# Altium PCB 3PDT_FootswitchAdapter.PcbDoc
Units mm, origin at the board's own origin, x right, y up, seen from the top; angles counter-clockwise.
Board outline 21.72 x 22.86 mm, 2 copper layers (Top Layer, Bottom Layer); 3 components, 9 nets, 21 pads, 0 vias.
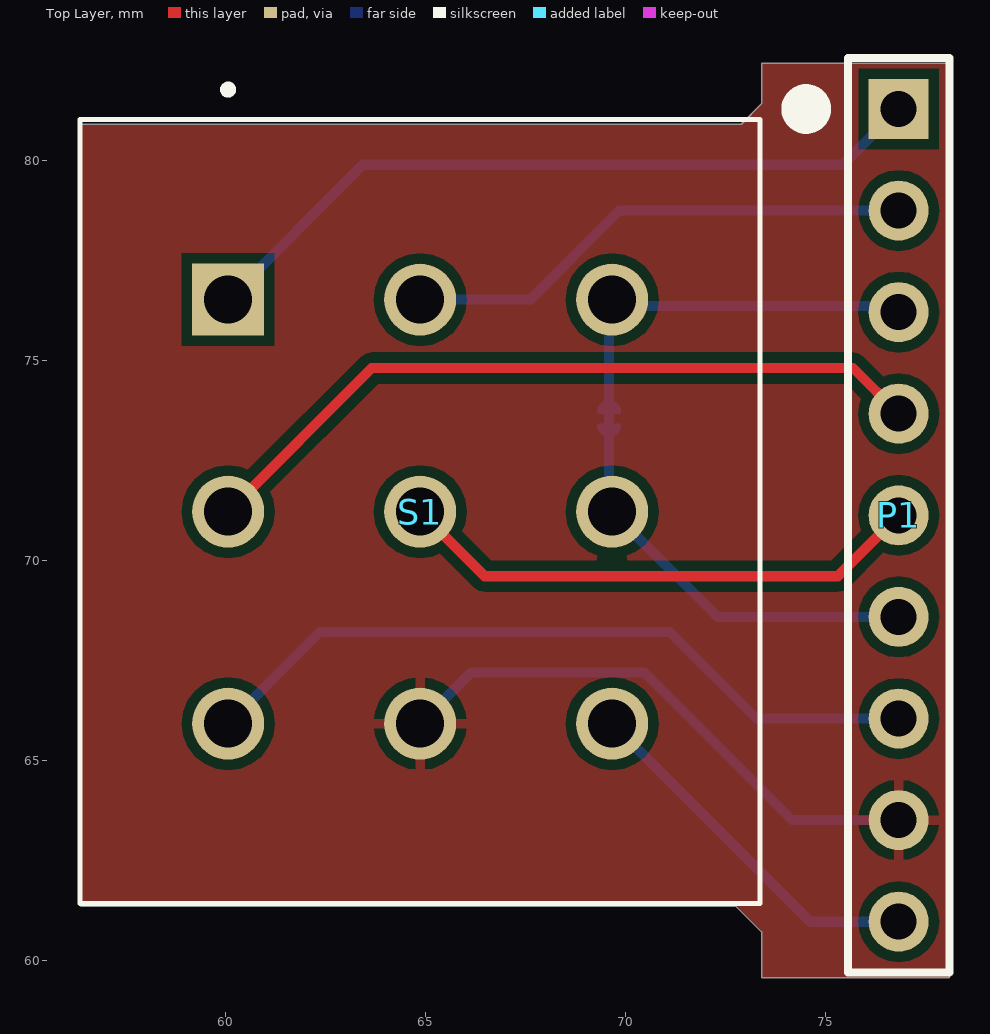
[diagram p0: Top Layer view]
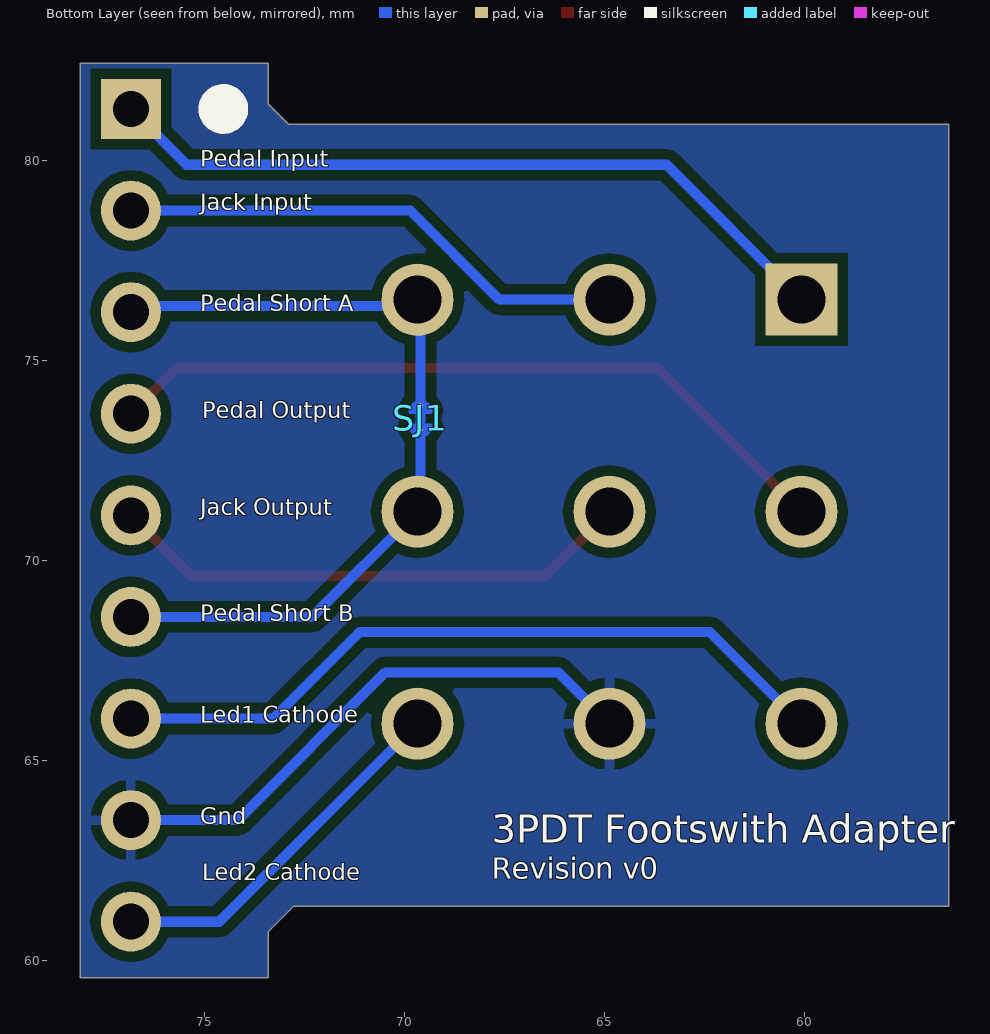
[diagram p1: Bottom Layer view, seen from below]

## Layer stack, top to bottom
Top Solder: solder mask 0.0102, Solder Resist, Dk 3.5
Top Layer: signal copper 0.0356
Dielectric 1: dielectric 0.32, FR-4, Dk 4.8
Bottom Layer: signal copper 0.0356
Bottom Solder: solder mask 0.0102, Solder Resist, Dk 3.5

## Board outline
56.388,61.341 72.771,61.341 73.406,60.706 73.406,59.563 78.105,59.563 78.105,82.423 73.406,82.423 73.406,81.407 72.898,80.899 56.388,80.899
board region "Default Layer Stack Region": 56.388,61.341 72.771,61.341 73.406,60.706 73.406,59.563 78.105,59.563 78.105,82.423 73.406,82.423 73.406,81.407 72.898,80.899 56.388,80.899
board region "Default Layer Stack Region": 56.388,61.341 72.771,61.341 73.406,60.706 73.406,59.563 78.105,59.563 78.105,82.423 73.406,82.423 73.406,81.407 72.898,80.899 56.388,80.899
board region "Layer Stack Region 1": 56.388,61.341 72.771,61.341 73.406,60.706 73.406,59.563 78.105,59.563 78.105,82.423 73.406,82.423 73.406,81.407 72.898,80.899 56.388,80.899

## Design rules (kind name [scope] priority, off if disabled: settings)
Clearance [All] p1: gap=0.254 ignorepadtopadclearanceinfootprint=FALSE except(0: Arc-Hole Track-Hole SMDPad-Hole THPad-Hole Via-Hole Fill-Hole Poly-Hole Region-Hole Text-Hole)
PolygonConnect [All] p1: connectstyle=Relief reliefconductorwidth=0.254 reliefentries=4 polygonreliefangle="90 Angle" airgapwidth=0.254
RoutingVias [All] p1: holewidth=0.711 width=1.27 viastyle="Through Hole" minholewidth=0.711 minwidth=1.27 maxholewidth=0.711 maxwidth=1.27
SolderMaskExpansion [All] p1: expansion=0.102 istentingtop=FALSE
Width [All] p1: maxlimit=0.254 minlimit=0.254 preferedwidth=0.254
30 further rules are at their usual default settings.

## Components (designator, comment, footprint, x,y, rotation, side; value= is the part's Value field where it differs from the comment)
P1 "Header 9" HDR1X9_2.54 76.835,81.28 r270 top
S1 "FS57003PLT2B2M2QE" SW_FS57003PLT2B2M2QE 64.871,71.213 r270 top
SJ1 "Solder Jumper Shorted" SOLDER_JUMPER_SHORTED 69.596,73.533 r90 bottom net-tie

## Footprints (in the part's own frame and the unit in brackets; to place one, negate y for a bottom-side part, rotate by r counter-clockwise, add the part's x,y. Pads: shape width x height; smd on the part's side, far side on the other; paste and mask are expansions set on the pad)
HDR1X9_2.54 [mm] "Connector; Header; 9 Position; 2.54mm"
  rect 1.5x1.5 hole 0.9: 1(0,0)
  round 1.5 hole 0.9: 2(2.54,0) 3(5.08,0) 4(7.62,0) 5(10.16,0) 6(12.7,0) 7(15.24,0) 8(17.78,0) 9(20.32,0)
  silkscreen extent -1.27,-1.27 21.59,1.27, body extent -1.27,-1.27 21.59,1.27, height 9.5
SOLDER_JUMPER_SHORTED [mm]
  round 0.1 smd mask+0: 1(-0.28,0) 1(-0.28,0) 2(0.33,0)
  Top Layer region: -0.19,0.25 -0.19,-0.25 -0.25,-0.25 -0.43,-0.07 -0.43,0.13
  Top Layer region: 0.17,-0.25 0.17,0.25 0.23,0.25 0.41,0.07 0.41,-0.13
  Top Layer lines w0.1: -0.17,-0.25 cw(c-0.17,0) -0.17,0.25 -0.17,-0.25 ; 0.17,-0.25 ccw(c0.17,0) 0.17,0.25 0.17,-0.25
  Top Layer lines w0.254: -0.17,0 0.17,0
SW_FS57003PLT2B2M2QE [mm]
  rect 1.8x1.8 / inner round 1.8 / far side rect 1.8x1.8 hole 1.2: 1(-5.3,-4.8)
  round 1.8 hole 1.2: 2(-5.3,0) 3(-5.3,4.8) 4(0,-4.8) 5(0,0) 6(0,4.8) 7(5.3,-4.8) 8(5.3,0) 9(5.3,4.8)
  silkscreen extent -10.65,-8.5 9.8,8.5, body extent -9.8,-8.5 9.8,8.5, height 2.6

## Part data
P1: "Header, 9-Pin", LatestRevisionDate=17-Jul-2002, LatestRevisionNote="Re-released for DXP Platform.", Publisher="Altium Limited"
S1: "Mechanical 3PDT Footswitch"

## Nets (pads, with @x,y where several pads share a name; then routed paths per layer and width w, separated by ;. In a path a pad name is that pad's centre, name@x,y a point inside that pad or via, vN(x,y) a via of type N, cw(c..) or ccw(c..) an arc to the next point about the centre after c; other vN are vias at no path point)
Gnd: P1.8 S1.8 | length 14
  Bottom Layer w0.254: S1.8 66.152,67.194 70.474,67.194 74.168,63.5 P1.8
JackInput: P1.2 S1.2 | length 12.9
  Bottom Layer w0.254: S1.2 67.623,76.513 69.85,78.74 P1.2
JackOutput: P1.5 S1.5 | length 13.3
  Top Layer w0.254: S1.5 66.488,69.596 75.311,69.596 P1.5
Led1_Cathode: P1.7 S1.7 | length 18.6
  Bottom Layer w0.254: S1.7 62.357,68.199 71.12,68.199 73.279,66.04 P1.7
Led2_Cathode: P1.9 S1.9 | length 9.2
  Bottom Layer w0.254: S1.9 74.624,60.96 P1.9
PedalInput: P1.1 S1.1 | length 18.7
  Bottom Layer w0.254: S1.1 63.441,79.883 75.438,79.883 P1.1
PedalOutput: P1.4 S1.4 | length 18.7
  Top Layer w0.254: S1.4 63.661,74.803 75.692,74.803 P1.4
PedalShort_A: P1.3 S1.3 SJ1.2 | length 10
  Bottom Layer w0.254: SJ1.2 69.596,76.438 S1.3 69.828,76.356 76.679,76.356 P1.3
PedalShort_B: P1.6 S1.6 SJ1.1 | length 10.3
  Bottom Layer w0.254: SJ1.1@69.596,73.253 69.596,71.288 S1.6 72.304,68.58 P1.6

## Polygon pours and split planes (outlines as drawn)
Gnd on Top Layer "GND_TOP" (solid, pour order 0): 56.388,61.341 72.771,61.341 73.406,60.706 73.406,59.563 78.105,59.563 78.105,82.423 73.406,82.423 73.406,81.407 72.898,80.899 56.388,80.899
Gnd on Bottom Layer "GND_BOTTOM" (solid, pour order 1): 56.388,61.341 72.771,61.341 73.406,60.706 73.406,59.563 78.105,59.563 78.105,82.423 73.406,82.423 73.406,81.407 72.898,80.899 56.388,80.899

## Silkscreen, mask and mechanical layers (free items; w line width, h text height)
Top Overlay:
  circle w0.635: c74.524,81.279 r0.305
  text "Super DOD" at 73.28,36.387 h2.5
  text "Revision v0" at 73.28,35.062 h1.5
Bottom Overlay:
  circle w0.635: c74.524,81.28 r0.305
  text "Pedal Input" at 75.104,79.691 h0.7
  text "Jack Input" at 75.105,78.61 h0.7
  text "Pedal Short A" at 75.104,76.08 h0.7
  text "Pedal Output" at 75.057,73.403 h0.7
  text "Jack Output" at 75.105,70.99 h0.7
  text "Pedal Short B" at 75.104,68.333 h0.7
  text "Led1 Cathode" at 75.104,65.793 h0.7
  text "Gnd" at 75.104,63.253 h0.7
  text "3PDT Footswith Adapter" at 67.817,62.698 h1.2
  text "Revision v0" at 67.818,61.855 h0.9
  text "Led2 Cathode" at 75.057,61.856 h0.7